# EAGLE board mso5000_socket (EAGLE 9.6.2)
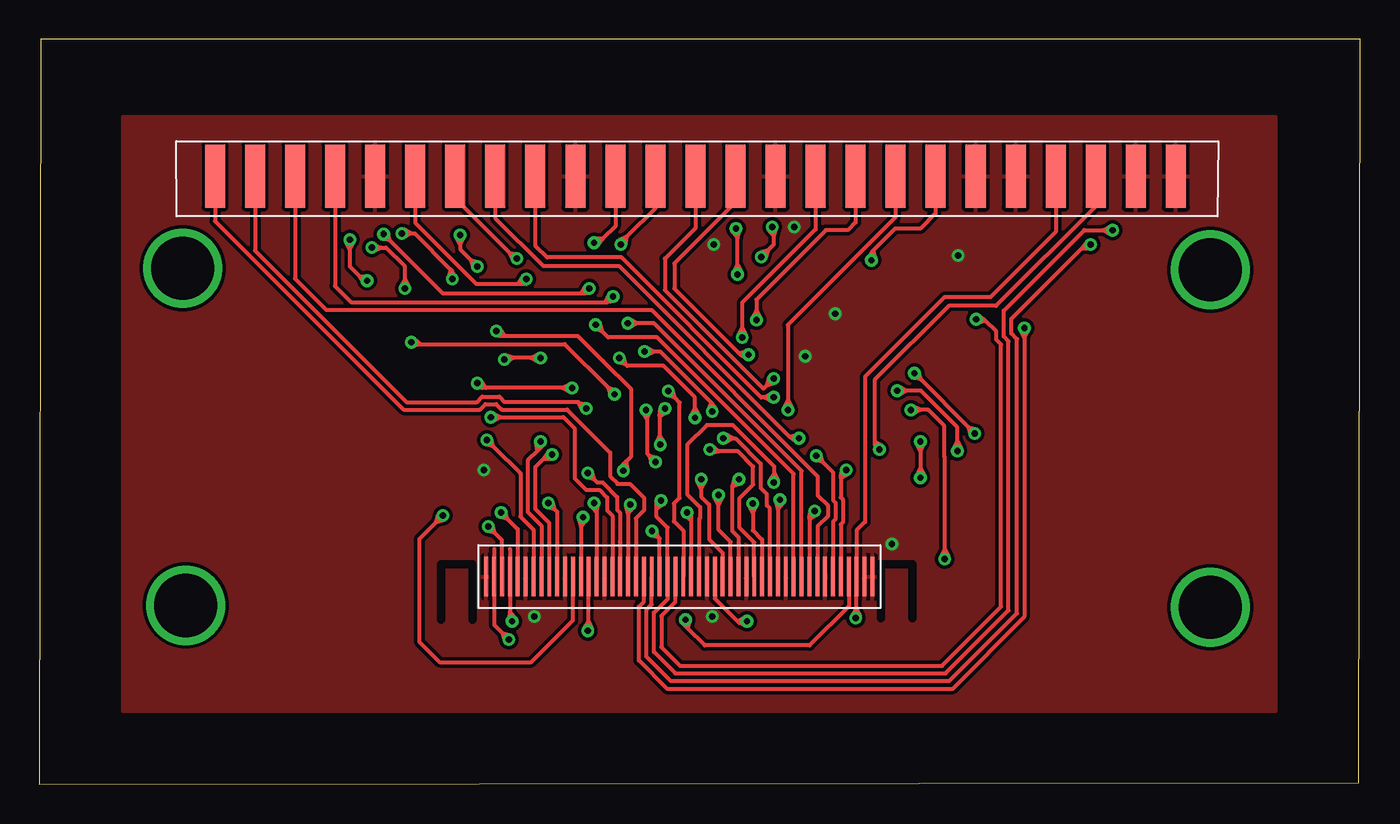
[diagram p0: board, top side]
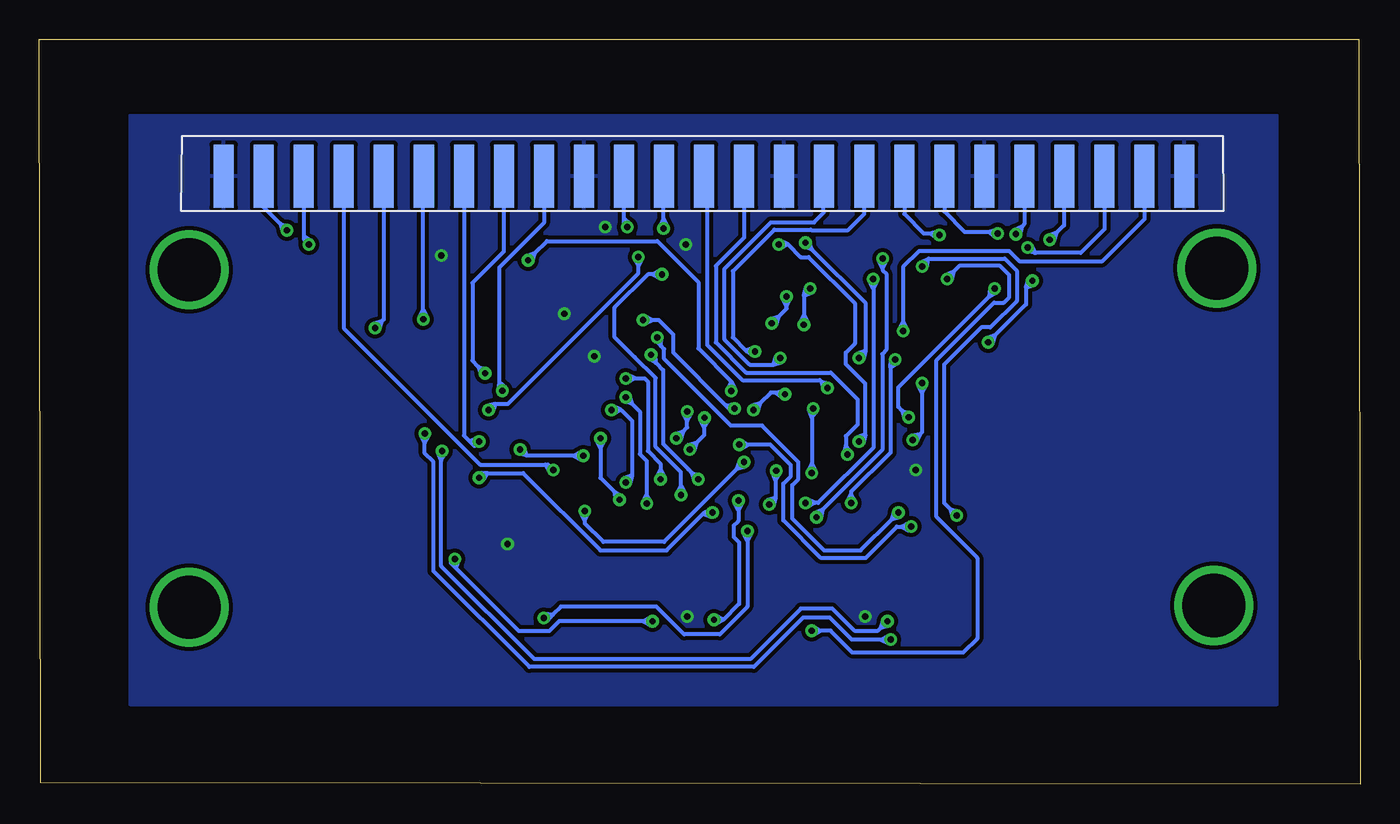
[diagram p1: board, bottom side, seen from below]

Size 83.79 x 47.23 mm. Coordinates in mm from the lower left corner, seen from the top.
Outline: 0,0 83.7,0.1 83.79,47.23 0.09,47.23 0,0
Copper layers (1*16): Top 0.035mm / dielectric 1.5mm / Bottom 0.035mm
Design rules "default *": minimum track width 6mil, minimum drill 0.35mm, track to track 0.22mm, track to pad 0.22mm, pad to pad 0.22mm, via to via 0.3mm, smd to smd 6mil, copper to edge 40mil, drill to drill 6mil, minimum pad ring 10mil, minimum via ring 8mil, stop-mask expansion 4mil, vias tented up to drill 0mil, thermal gap 10mil
tRestrict: 6 lines

## Footprints (pad centres in the part's own frame; a part is rotated, then mirrored left to right if it is on the bottom)
1X25_IDC_PADS = smd 1.27 x 4: P$1 -30.48,0; P$2 -27.94,0; P$3 -25.4,0; P$4 -22.86,0; P$5 -20.32,0; P$6 -17.78,0; P$7 -15.24,0; P$8 -12.7,0; P$9 -10.16,0; P$10 -7.62,0; P$11 -5.08,0; P$12 -2.54,0; P$13 0,0; P$14 2.54,0; P$15 5.08,0; P$16 7.62,0; P$17 10.16,0; P$18 12.7,0; P$19 15.24,0; P$20 17.78,0; P$21 20.32,0; P$22 22.86,0; P$23 25.4,0; P$24 27.94,0; P$25 30.48,0
ZIFF-050 = smd 0.25 x 2.5: P$1 -12,0; P$2 -11.5,0; P$3 -11,0; P$4 -10.5,0; P$5 -10,0; P$6 -9.5,0; P$7 -9,0; P$8 -8.5,0; P$9 -8,0; P$10 -7.5,0; P$11 -7,0; P$12 -6.5,0; P$13 -6,0; P$14 -5.5,0; P$15 -5,0; P$16 -4.5,0; P$17 -4,0; P$18 -3.5,0; P$19 -3,0; P$20 -2.5,0; P$21 -2,0; P$22 -1.5,0; P$23 -1,0; P$24 -0.5,0; P$25 0,0; P$26 0.5,0; P$27 1,0; P$28 1.5,0; P$29 2,0; P$30 2.5,0; P$31 3,0; P$32 3.5,0; P$33 4,0; P$34 4.5,0; P$35 5,0; P$36 5.5,0; P$37 6,0; P$38 6.5,0; P$39 7,0; P$40 7.5,0; P$41 8,0; P$42 8.5,0; P$43 9,0; P$44 9.5,0; P$45 10,0; P$46 10.5,0; P$47 11,0; P$48 11.5,0; P$49 12,0; P$50 12.5,0

## Placement (x,y rotation side)
IDC_BOTTOM  [1X25_IDC_PADS]  41.62,38.56 180 bottom
IDC_TOP  [1X25_IDC_PADS]  41.62,38.56 0 top
U$3  ZIFF-050  [ZIFF-050]  40.35,13.16 0 top

## Library data of the parts
IDC_BOTTOM IDC_TOP U$3 = pinhead

## Nets
!D0: IDC_BOTTOM.P$18 U$3.P$2
!D1: IDC_BOTTOM.P$17 U$3.P$4
!D2: IDC_BOTTOM.P$13 U$3.P$7
!D3: IDC_BOTTOM.P$12 U$3.P$9
!D4: IDC_BOTTOM.P$8 U$3.P$12
!D5: IDC_BOTTOM.P$7 U$3.P$14
!D6: IDC_BOTTOM.P$3 U$3.P$17
!D7: IDC_BOTTOM.P$2 U$3.P$19
!D8: IDC_BOTTOM.P$20 U$3.P$25
!D9: IDC_BOTTOM.P$19 U$3.P$27
!D10: IDC_BOTTOM.P$15 U$3.P$30
!D11: IDC_BOTTOM.P$14 U$3.P$32
!D12: IDC_BOTTOM.P$10 U$3.P$35
!D13: IDC_BOTTOM.P$9 U$3.P$37
!D14: IDC_BOTTOM.P$5 U$3.P$40
!D15: IDC_BOTTOM.P$4 U$3.P$42
+2V5: IDC_TOP.P$22 U$3.P$23 U$3.P$48
+4V_1: IDC_BOTTOM.P$21 U$3.P$21
+4V_2: IDC_BOTTOM.P$22 U$3.P$46
-2V5: IDC_BOTTOM.P$24 U$3.P$24 U$3.P$47
D0: IDC_TOP.P$17 U$3.P$3
D1: IDC_TOP.P$16 U$3.P$5
D2: IDC_TOP.P$12 U$3.P$8
D3: IDC_TOP.P$11 U$3.P$10
D4: IDC_TOP.P$7 U$3.P$13
D5: IDC_TOP.P$6 U$3.P$15
D6: IDC_TOP.P$2 U$3.P$18
D7: IDC_TOP.P$1 U$3.P$20
D8: IDC_TOP.P$19 U$3.P$26
D9: IDC_TOP.P$18 U$3.P$28
D10: IDC_TOP.P$14 U$3.P$31
D11: IDC_TOP.P$13 U$3.P$33
D12: IDC_TOP.P$9 U$3.P$36
D13: IDC_TOP.P$8 U$3.P$38
D14: IDC_TOP.P$4 U$3.P$41
D15: IDC_TOP.P$3 U$3.P$43
GND: IDC_BOTTOM.P$1 IDC_BOTTOM.P$6 IDC_BOTTOM.P$11 IDC_BOTTOM.P$16 IDC_BOTTOM.P$25 IDC_TOP.P$5 IDC_TOP.P$10 IDC_TOP.P$15 IDC_TOP.P$20 IDC_TOP.P$21 IDC_TOP.P$24 IDC_TOP.P$25 U$3.P$1 U$3.P$6 U$3.P$11 U$3.P$16 U$3.P$29 U$3.P$34 U$3.P$39 U$3.P$44 U$3.P$49 U$3.P$50
VREF_0-7: IDC_BOTTOM.P$23 U$3.P$22
VREF_8-15: IDC_TOP.P$23 U$3.P$45

## Tracks (layer width: path | path; a pad name or v marks a point on that pad's centre or on a via)
!D0  (via drill 0.4)
  Top 0.254: 28.85,14.92 U$3.P$2 28.85,10.11 29.37,9.59 | 29.37,9.59 v29.79,9.16 | v59.34,22.24 58.92,22.66 | 58.92,22.66 55.94,25.64 | 55.94,25.64 v55.52,26.06 | 29.37,9.59 29.53,9.08 v29.79,9.16 | 29.37,9.59 29.87,9.43 v29.79,9.16 | 58.92,22.66 59.08,22.15 v59.34,22.24 | 58.92,22.66 59.43,22.5 v59.34,22.24 | 55.94,25.64 55.78,26.14 v55.52,26.06 | 55.94,25.64 55.44,25.8 v55.52,26.06
  Bottom 0.254: v29.79,9.16 30.39,9.16 | 30.39,9.16 32.24,9.16 33.63,10.56 35.33,10.56 38.46,7.43 52.7,7.43 58.79,13.52 58.79,20.43 59.34,20.98 59.34,21.64 | 59.34,21.64 v59.34,22.24 | IDC_BOTTOM.P$18 54.32,33.79 56.32,31.8 56.32,26.86 55.94,26.48 | v55.52,26.06 55.94,26.48 | 30.39,9.16 29.92,9.41 v29.79,9.16 | 30.39,9.16 29.92,8.92 v29.79,9.16 | 59.34,21.64 59.59,22.11 v59.34,22.24 | 59.34,21.64 59.1,22.11 v59.34,22.24 | 55.94,26.48 55.44,26.32 v55.52,26.06 | 55.94,26.48 55.78,25.98 v55.52,26.06
!D1  (via drill 0.4)
  Top 0.254: 29.85,14.92 U$3.P$4 29.85,10.91 | v29.99,10.33 29.85,10.47 29.85,10.91 | v58.24,21.13 58.24,21.73 | 58.24,21.73 58.24,22.63 55.91,24.95 55.01,24.95 | 55.01,24.95 v54.41,24.95 | 29.85,10.91 29.72,10.4 v29.99,10.33 | 29.85,10.91 30.2,10.51 v29.99,10.33 | 58.24,21.73 57.99,21.26 v58.24,21.13 | 58.24,21.73 58.48,21.26 v58.24,21.13 | 55.01,24.95 54.54,25.2 v54.41,24.95 | 55.01,24.95 54.54,24.71 v54.41,24.95
  Bottom 0.254: 51.99,38.35 IDC_BOTTOM.P$17 51.78,35.59 54.61,32.76 54.61,25.52 | v29.99,10.33 30.41,9.91 | 30.41,9.91 30.59,9.73 32.09,9.73 33.48,11.12 35.48,11.12 38.68,7.93 52.39,7.93 58.29,13.83 58.29,20.53 | 58.29,20.53 58.29,21.13 v58.24,21.13 | 54.61,25.52 54.61,25.15 v54.41,24.95 | 30.41,9.91 30.25,10.41 v29.99,10.33 | 30.41,9.91 29.91,10.07 v29.99,10.33 | 58.29,20.53 58.49,21.03 v58.24,21.13 | 58.29,20.53 58,20.98 v58.24,21.13 | 54.61,25.52 54.23,25.16 v54.41,24.95 | 54.61,25.52 54.69,24.99 v54.41,24.95
!D2  (via drill 0.4)
  Top 0.254: v33.79,25.13 33.19,25.13 | 33.19,25.13 28.31,25.13 | 28.31,25.13 28.09,25.13 v27.79,25.43 | v28.39,21.83 28.81,21.41 | 28.81,21.41 30.51,19.71 30.51,16.97 31.35,16.13 U$3.P$7 | 33.19,25.13 33.66,24.89 v33.79,25.13 | 33.19,25.13 33.66,25.38 v33.79,25.13 | 28.31,25.13 28.02,25.58 v27.79,25.43 | 28.31,25.13 27.78,25.15 v27.79,25.43 | 28.81,21.41 28.65,21.91 v28.39,21.83 | 28.81,21.41 28.31,21.57 v28.39,21.83
  Bottom 0.254: IDC_BOTTOM.P$13 41.42,38.36 41.42,27.86 39.19,25.63 34.29,25.63 34.21,25.55 | v27.79,25.43 27.79,24.83 | 27.79,24.83 27.79,22.33 27.92,22.2 | v28.39,21.83 28.29,21.83 27.92,22.2 | v33.79,25.13 34.21,25.55 | 34.21,25.55 33.71,25.39 v33.79,25.13 | 34.21,25.55 34.05,25.05 v33.79,25.13 | 27.79,24.83 28.04,25.3 v27.79,25.43 | 27.79,24.83 27.54,25.3 v27.79,25.43 | 27.92,22.2 28.14,21.72 v28.39,21.83 | 27.92,22.2 28.44,22.1 v28.39,21.83
!D3  (via drill 0.4)
  Top 0.254: v32.52,20.9 32.26,20.9 31.99,20.63 | U$3.P$9 32.35,16.57 31.46,17.46 31.46,20.1 31.99,20.63 | 31.99,20.63 32.52,20.62 v32.52,20.9 | 31.99,20.63 32.3,21.06 v32.52,20.9
  Bottom 0.254: IDC_BOTTOM.P$12 39.08,34.66 40.88,32.86 40.88,28.02 38.96,26.1 33.59,26.1 31.89,24.4 31.89,22.8 32.62,22.07 32.62,21.49 | 32.62,21.49 32.62,21.45 | 32.62,21.45 32.62,21.39 32.52,21.29 v32.52,20.9 | 32.62,21.45 32.32,21.05 v32.52,20.9 | 32.62,21.49 32.79,20.98 v32.52,20.9
!D4  (via drill 0.4)
  Top 0.254: v26.69,34.83 26.69,34.23 | 26.69,34.23 26.69,33.93 27.37,33.25 | 27.37,33.25 v27.79,32.83 | v25.59,17.03 25.17,16.61 | 25.17,16.61 24.09,15.53 24.09,9.03 25.38,7.73 31.2,7.73 33.85,10.39 U$3.P$12 | 26.69,34.23 26.93,34.7 v26.69,34.83 | 26.69,34.23 26.45,34.7 v26.69,34.83 | 27.37,33.25 27.53,32.75 v27.79,32.83 | 27.37,33.25 27.87,33.09 v27.79,32.83 | 25.17,16.61 25.67,16.77 v25.59,17.03 | 25.17,16.61 25.33,17.11 v25.59,17.03
  Bottom 0.254: IDC_BOTTOM.P$8 28.92,36.16 27.69,34.93 27.28,34.93 | 27.28,34.93 26.69,34.93 v26.69,34.83 | v27.79,32.83 27.79,32.93 27.42,33.3 | 27.42,33.3 27.39,33.33 22.55,33.33 21.79,32.57 21.79,30.63 23.46,28.96 24.03,28.96 26.39,26.6 26.39,17.83 26.01,17.45 | 26.01,17.45 v25.59,17.03 | 27.28,34.93 26.77,35.09 v26.69,34.83 | 27.28,34.93 26.86,34.61 v26.69,34.83 | 27.42,33.3 27.52,32.78 v27.79,32.83 | 27.42,33.3 27.9,33.08 v27.79,32.83 | 26.01,17.45 25.51,17.29 v25.59,17.03 | 26.01,17.45 25.85,16.95 v25.59,17.03
!D5  (via drill 0.4)
  Top 0.254: v26.19,32.03 26.19,32.53 26.1,32.62 | 26.1,32.62 23.79,34.93 23.59,34.93 | v22.99,34.93 23.59,34.93 | v34.79,9.73 34.85,9.79 34.85,10.33 | 34.85,10.33 U$3.P$14 | 23.59,34.93 23.12,35.17 v22.99,34.93 | 23.59,34.93 23.12,34.68 v22.99,34.93 | 26.1,32.62 25.93,32.12 v26.19,32.03 | 26.1,32.62 26.41,32.19 v26.19,32.03 | 34.85,10.33 34.56,9.88 v34.79,9.73 | 34.85,10.33 35.05,9.83 v34.79,9.73
  Bottom 0.254: IDC_BOTTOM.P$7 26.38,36.32 25.09,35.03 23.58,35.03 | 23.58,35.03 22.99,35.03 v22.99,34.93 | 34.19,9.73 33.59,9.73 32.2,8.34 25.18,8.34 24.29,9.23 24.29,14.36 26.88,16.94 26.88,26.88 23.23,30.53 22.61,30.53 22.26,30.89 22.26,32.27 22.85,32.86 25.43,32.86 25.8,32.49 | 34.19,9.73 v34.79,9.73 | v26.19,32.03 26.19,32.1 25.8,32.49 | 23.58,35.03 23.07,35.19 v22.99,34.93 | 23.58,35.03 23.16,34.71 v22.99,34.93 | 25.8,32.49 25.92,31.97 v26.19,32.03 | 25.8,32.49 26.3,32.28 v26.19,32.03 | 34.19,9.73 34.66,9.48 v34.79,9.73 | 34.19,9.73 34.66,9.97 v34.79,9.73
!D6  (via drill 0.4)
  Top 0.254: v23.19,31.43 23.19,32.03 | 23.19,32.03 23.19,32.83 21.99,34.03 21.69,34.03 | v21.09,34.03 21.64,34.03 | 21.64,34.03 21.69,34.03 | v28.64,23.27 29.24,23.27 | 29.24,23.27 33.25,23.27 33.96,22.56 33.96,19.39 34.69,18.66 35.53,18.66 36.02,18.17 36.02,17.36 36.35,17.03 U$3.P$17 | 21.64,34.03 21.21,34.25 v21.09,34.03 | 21.69,34.03 21.22,33.78 v21.09,34.03 | 23.19,32.03 22.95,31.56 v23.19,31.43 | 23.19,32.03 23.43,31.56 v23.19,31.43 | 29.22,23.26 28.76,23.5 v28.64,23.27 | 29.24,23.27 29.22,23.26 | 29.22,23.26 28.77,23.03 v28.64,23.27
  Bottom 0.254: IDC_BOTTOM.P$3 16.22,35.2 17.72,33.7 20.59,33.7 | 23.52,30.93 29.29,25.16 29.29,23.92 29.06,23.69 | 23.52,30.93 23.19,31.26 v23.19,31.43 | v28.64,23.27 29.06,23.69 | 20.59,33.7 20.63,33.7 20.96,34.03 v21.09,34.03 | 20.59,33.7 21.12,33.75 v21.09,34.03 | 20.59,33.7 20.85,34.16 v21.09,34.03 | 23.52,30.93 23.46,31.46 v23.19,31.43 | 23.52,30.93 23.05,31.19 v23.19,31.43 | 29.06,23.69 28.56,23.53 v28.64,23.27 | 29.06,23.69 28.9,23.19 v28.64,23.27
!D7  (via drill 0.4)
  Top 0.254: v28.99,28.73 28.99,28.63 29.19,28.43 29.51,28.43 | 29.51,28.43 34.15,28.43 35.75,26.83 35.77,26.83 37.52,25.07 37.52,20.76 37.21,20.45 | v37.49,17.73 37.35,17.59 37.35,17.15 | 37.35,17.15 U$3.P$19 | 37.21,20.45 37.04,20.28 v37.04,19.88 | 29.51,28.43 29.22,28.88 v28.99,28.73 | 29.51,28.43 28.98,28.45 v28.99,28.73 | 37.21,20.45 36.84,20.07 v37.04,19.88 | 37.21,20.45 37.31,19.93 v37.04,19.88 | 37.35,17.15 37.7,17.55 v37.49,17.73 | 37.35,17.15 37.22,17.66 v37.49,17.73
  Bottom 0.254: IDC_BOTTOM.P$2 13.68,35.84 16.39,33.13 21.57,33.13 22.25,33.81 27.99,33.81 28.99,32.8 28.99,29.33 | 28.99,29.33 v28.99,28.73 | v37.04,19.88 37.09,19.83 37.09,19.28 | 37.09,19.28 37.09,18.18 | 37.09,18.18 37.09,18.13 v37.49,17.73 | 28.99,29.33 28.74,28.86 v28.99,28.73 | 28.99,29.33 29.23,28.86 v28.99,28.73 | 37.09,19.28 37.3,19.77 v37.04,19.88 | 37.09,19.28 36.81,19.73 v37.04,19.88 | 37.09,18.18 37.22,17.66 v37.49,17.73 | 37.09,18.18 37.59,17.99 v37.49,17.73
!D8  (via drill 0.4)
  Top 0.254: v59.44,29.48 59.94,29.48 60.03,29.39 | U$3.P$25 40.35,11.57 39.46,10.67 39.46,8.69 40.65,7.5 57.26,7.5 61.02,11.26 61.02,27.89 60.71,28.19 60.71,28.71 60.03,29.39 | 60.03,29.39 59.6,29.7 v59.44,29.48 | 60.03,29.39 59.53,29.22 v59.44,29.48
  Bottom 0.254: v59.44,29.48 59.44,30.08 | 59.44,30.08 59.44,38.52 IDC_BOTTOM.P$20 | 59.44,30.08 59.2,29.61 v59.44,29.48 | 59.44,30.08 59.69,29.61 v59.44,29.48
!D9  (via drill 0.4)
  Top 0.254: v55.89,21.73 55.89,21.13 | 55.89,21.13 55.89,20.03 | 55.89,20.03 55.89,19.63 55.99,19.53 v55.89,19.43 | v41.09,17.23 41.35,16.97 | v41.09,17.23 41.35,16.97 41.35,16.69 | 41.35,16.69 U$3.P$27 | 55.89,21.13 56.13,21.6 v55.89,21.73 | 55.89,21.13 55.64,21.6 v55.89,21.73 | 55.89,20.03 55.64,19.56 v55.89,19.43 | 55.89,20.03 56.13,19.56 v55.89,19.43 | 41.35,16.69 41.37,17.22 v41.09,17.23 | 41.35,16.69 40.92,17.01 v41.09,17.23
  Bottom 0.254: 56.89,38.53 IDC_BOTTOM.P$19 56.86,22.1 56.49,21.73 | 56.49,21.73 56.19,21.43 v55.89,21.73 | v55.89,19.43 55.59,19.73 55.37,19.73 | 55.37,19.73 53.09,19.73 48.19,14.83 43.99,14.83 41.68,17.14 | 41.68,17.14 41.59,17.23 v41.09,17.23 | 56.49,21.73 56.02,21.98 v55.89,21.73 | 56.49,21.73 56.02,21.48 v55.89,21.73 | 55.37,19.73 55.66,19.28 v55.89,19.43 | 55.37,19.73 55.9,19.71 v55.89,19.43 | 41.68,17.14 41.25,17.45 v41.09,17.23 | 41.68,17.14 41.18,16.97 v41.09,17.23
!D10  (via drill 0.4)
  Top 0.254: U$3.P$30 42.85,11.77 44.29,10.33 | 44.29,10.33 44.39,10.23 44.79,10.23 v44.89,10.33 | v57.44,14.28 57.44,14.88 | 57.44,14.88 57.44,20.75 57.41,20.79 57.41,22.71 56.39,23.73 55.89,23.73 | 55.89,23.73 v55.29,23.73 | v45.79,33.43 46.21,33.85 | 46.21,33.85 46.59,34.23 46.59,34.74 | 46.59,34.74 46.59,35.33 v46.49,35.33 | 44.29,10.33 44.76,10.09 v44.89,10.33 | 44.29,10.33 44.76,10.58 v44.89,10.33 | 57.44,14.88 57.2,14.41 v57.44,14.28 | 57.44,14.88 57.69,14.41 v57.44,14.28 | 55.89,23.73 55.42,23.98 v55.29,23.73 | 55.89,23.73 55.42,23.48 v55.29,23.73 | 46.21,33.85 45.71,33.69 v45.79,33.43 | 46.21,33.85 46.05,33.35 v45.79,33.43 | 46.59,34.74 46.75,35.24 v46.49,35.33 | 46.59,34.74 46.27,35.16 v46.49,35.33
  Bottom 0.254: v44.89,10.33 45.49,10.33 | 45.49,10.33 50.82,10.33 51.45,9.7 53.36,9.7 57.35,13.69 | 57.35,13.69 57.69,14.03 v57.44,14.28 | v55.29,23.73 54.9,24.12 54.84,24.12 | 54.84,24.12 54.07,24.12 45.79,32.4 45.79,32.83 | 45.79,32.83 v45.79,33.43 | v46.49,35.33 46.7,35.54 46.7,35.89 | 46.7,35.89 IDC_BOTTOM.P$15 | 45.49,10.33 45.02,10.58 v44.89,10.33 | 45.49,10.33 45.02,10.09 v44.89,10.33 | 57.35,13.69 57.66,14.12 v57.44,14.28 | 57.35,13.69 57.18,14.19 v57.44,14.28 | 54.84,24.12 55.03,23.63 v55.29,23.73 | 54.84,24.12 55.35,24 v55.29,23.73 | 45.79,32.83 46.03,33.3 v45.79,33.43 | 45.79,32.83 45.55,33.3 v45.79,33.43 | 46.7,35.89 46.3,35.53 v46.49,35.33 | 46.7,35.89 46.76,35.36 v46.49,35.33
!D11  (via drill 0.4)
  Top 0.254: U$3.P$32 43.85,15.37 43.09,16.13 43.09,17.73 | v44.29,32.33 44.29,32.93 | 44.29,32.93 44.29,34.64 | 44.29,34.64 44.29,35.13 v44.19,35.23 | 43.09,17.73 v43.09,18.33 | 43.09,17.73 43.34,18.2 v43.09,18.33 | 43.09,17.73 42.84,18.2 v43.09,18.33 | 44.29,32.93 44.05,32.46 v44.29,32.33 | 44.29,32.93 44.53,32.46 v44.29,32.33 | 44.29,34.64 44.45,35.14 v44.19,35.23 | 44.29,34.64 43.97,35.06 v44.19,35.23
  Bottom 0.254: 44.16,37.06 IDC_BOTTOM.P$14 44.19,38.53 44.19,35.83 | v44.19,35.23 44.19,35.83 | v43.09,18.33 43.09,18.93 | 43.09,18.93 43.09,19.79 44.69,21.39 44.69,25.76 46.02,27.09 46.02,27.06 47.29,28.33 47.29,30.23 45.19,32.33 44.89,32.33 | v44.29,32.33 44.89,32.33 | 43.09,18.93 42.84,18.46 v43.09,18.33 | 43.09,18.93 43.34,18.46 v43.09,18.33 | 44.89,32.33 44.42,32.57 v44.29,32.33 | 44.89,32.33 44.42,32.09 v44.29,32.33 | 44.19,35.83 43.95,35.36 v44.19,35.23 | 44.19,35.83 44.44,35.36 v44.19,35.23
!D12  (via drill 0.4)
  Top 0.254: U$3.P$35 45.35,15.33 44.43,16.25 44.43,18.14 45.29,19 45.29,20.13 44.32,21.1 43.11,21.1 | v42.52,21.23 42.59,21.29 42.85,21.29 43.05,21.1 43.08,21.1 | 43.11,21.1 43.08,21.1 | v41.59,23.23 41.59,23.83 | 41.59,23.83 41.59,24.53 39.59,26.53 37.29,26.53 37.21,26.61 | 37.21,26.61 v36.79,27.03 | 43.08,21.1 42.69,21.43 v42.52,21.23 | 43.11,21.1 42.6,20.96 v42.52,21.23 | 41.59,23.83 41.34,23.36 v41.59,23.23 | 41.59,23.83 41.84,23.36 v41.59,23.23 | 37.21,26.61 37.05,27.11 v36.79,27.03 | 37.21,26.61 36.71,26.77 v36.79,27.03
  Bottom 0.254: 34,38.58 34.04,38.62 34.04,36.24 34.65,35.63 | IDC_BOTTOM.P$10 34,38.58 | v42.52,21.23 42.1,21.65 | 42.1,21.65 41.62,22.13 41.62,22.63 | v41.59,23.23 41.62,23.2 41.62,22.63 | v36.79,27.03 37.21,26.61 | 37.21,26.61 37.22,26.6 38.73,26.6 40.32,28.19 40.32,32.7 37.39,35.63 34.65,35.63 | 34.65,35.63 | IDC_BOTTOM.P$10 34,38.58 | 42.1,21.65 42.26,21.15 v42.52,21.23 | 42.1,21.65 42.61,21.49 v42.52,21.23 | 41.62,22.63 41.84,23.12 v41.59,23.23 | 41.62,22.63 41.35,23.09 v41.59,23.23 | 37.21,26.61 37.05,27.11 v36.79,27.03 | 37.21,26.61 36.71,26.77 v36.79,27.03
!D13  (via drill 0.4)
  Top 0.254: U$3.P$37 46.35,17.5 46.16,17.69 46.16,18.39 45.76,18.79 45.76,20.33 44.16,21.93 43.99,21.93 | v42.69,23.63 42.69,24.13 42.6,24.22 | 42.6,24.22 39.39,27.43 38.99,27.43 | 38.99,27.43 v38.39,27.43 | v43.39,21.93 43.99,21.93 | 43.99,21.93 43.52,22.18 v43.39,21.93 | 43.99,21.93 43.52,21.68 v43.39,21.93 | 42.6,24.22 42.43,23.72 v42.69,23.63 | 42.6,24.22 42.91,23.79 v42.69,23.63 | 38.99,27.43 38.52,27.68 v38.39,27.43 | 38.99,27.43 38.52,27.18 v38.39,27.43
  Bottom 0.254: v43.39,21.93 42.97,22.35 | 42.97,22.35 42.69,22.63 42.69,23.03 | 42.69,23.03 v42.69,23.63 | 38.98,27.52 39.79,28.33 39.79,32.53 37.16,35.16 34.85,35.16 34.82,35.13 32.49,35.13 31.46,36.16 IDC_BOTTOM.P$9 | 38.98,27.52 38.89,27.43 v38.39,27.43 | 42.97,22.35 43.13,21.85 v43.39,21.93 | 42.97,22.35 43.47,22.19 v43.39,21.93 | 42.69,23.03 42.94,23.5 v42.69,23.63 | 42.69,23.03 42.45,23.5 v42.69,23.63 | 38.98,27.52 38.48,27.69 v38.39,27.43 | 38.98,27.52 38.55,27.21 v38.39,27.43
!D14  (via drill 0.4)
  Top 0.254: v34.89,31.43 34.59,31.13 34.37,31.13 | v21.84,34.88 22.26,34.46 | 22.26,34.46 25.59,31.13 34.37,31.13 | U$3.P$40 47.85,19.67 39.19,28.33 36.09,28.33 35.71,28.71 | 35.71,28.71 v35.29,29.13 | 22.26,34.46 22.1,34.96 v21.84,34.88 | 22.26,34.46 21.76,34.62 v21.84,34.88 | 34.37,31.13 34.9,31.15 v34.89,31.43 | 34.37,31.13 34.66,31.58 v34.89,31.43 | 35.71,28.71 35.55,29.21 v35.29,29.13 | 35.71,28.71 35.21,28.87 v35.29,29.13
  Bottom 0.254: IDC_BOTTOM.P$5 21.3,35.52 21.47,35.35 | v21.84,34.88 21.84,34.98 21.47,35.35 | v34.89,31.43 35.29,31.03 35.29,30.98 | 35.29,30.98 35.29,29.73 | 35.29,29.73 v35.29,29.13 | 21.47,35.35 21.57,34.83 v21.84,34.88 | 21.47,35.35 21.95,35.13 v21.84,34.88 | 35.29,30.98 35.16,31.5 v34.89,31.43 | 35.29,30.98 34.79,31.17 v34.89,31.43 | 35.29,29.73 35.05,29.26 v35.29,29.13 | 35.29,29.73 35.54,29.26 v35.29,29.13
!D15  (via drill 0.4)
  Top 0.254: v19.69,34.53 19.69,33.93 | 19.69,33.93 19.69,32.83 20.28,32.24 | v20.79,31.93 20.59,31.93 20.28,32.24 | 24.18,27.9 23.72,27.9 v23.59,28.03 | 24.18,27.9 33.32,27.9 36.07,25.15 | v38.48,23.73 38.56,23.65 38.56,23.14 | 38.56,23.14 38.56,20.95 38.67,20.85 | v39.09,20.42 38.67,20.85 | v49.19,17.33 48.85,16.99 48.85,16.84 | 48.85,16.84 U$3.P$42 | 36.07,25.15 v36.49,24.73 | 19.69,33.93 19.93,34.4 v19.69,34.53 | 19.69,33.93 19.45,34.4 v19.69,34.53 | 20.28,32.24 20.55,31.79 v20.79,31.93 | 20.28,32.24 20.81,32.21 v20.79,31.93 | 24.18,27.9 23.77,28.24 v23.59,28.03 | 24.18,27.9 23.66,27.76 v23.59,28.03 | 36.07,25.15 36.23,24.65 v36.49,24.73 | 36.07,25.15 36.57,24.99 v36.49,24.73 | 38.56,23.14 38.74,23.64 v38.48,23.73 | 38.56,23.14 38.26,23.57 v38.48,23.73 | 38.67,20.85 38.83,20.34 v39.09,20.42 | 38.67,20.85 39.17,20.69 v39.09,20.42 | 48.85,16.84 49.32,17.09 v49.19,17.33 | 48.85,16.84 48.92,17.36 v49.19,17.33
  Bottom 0.254: IDC_BOTTOM.P$4 18.79,38.53 18.79,35.43 19.27,34.95 | 19.27,34.95 v19.69,34.53 | v23.59,28.03 23.17,28.45 | 23.17,28.45 21.19,30.43 21.19,31.48 | v20.79,31.93 21.19,31.53 21.19,31.48 | v36.49,24.73 36.49,24.83 37.08,24.83 | 38.06,24.16 37.39,24.83 37.08,24.83 | 38.06,24.16 v38.48,23.74 v38.48,23.73 | 39.52,20 44.15,15.37 48,15.37 49.19,16.56 49.19,16.73 | 39.52,20 v39.1,20.42 v39.09,20.42 | v49.19,17.33 49.19,16.73 | 19.27,34.95 19.43,34.45 v19.69,34.53 | 19.27,34.95 19.77,34.79 v19.69,34.53 | 21.19,31.48 21.06,32 v20.79,31.93 | 21.19,31.48 20.69,31.67 v20.79,31.93 | 23.17,28.45 23.33,27.95 v23.59,28.03 | 23.17,28.45 23.67,28.29 v23.59,28.03 | 37.08,24.83 36.58,24.99 v36.49,24.73 | 37.08,24.83 36.66,24.51 v36.49,24.73 | 38.06,24.16 38.22,23.65 v38.48,23.73 | 38.06,24.16 38.57,23.99 v38.48,23.73 | 39.52,20 39.35,20.51 v39.09,20.42 | 39.52,20 39.01,20.16 v39.09,20.42 | 49.19,16.73 49.44,17.2 v49.19,17.33 | 49.19,16.73 48.95,17.2 v49.19,17.33
+2V5  (via drill 0.4)
  Top 0.254: IDC_TOP.P$22 64.48,35.02 60.34,30.88 57.42,30.88 52.39,25.85 52.39,16.63 51.85,16.09 U$3.P$48 51.85,11.13 | U$3.P$23 39.35,15.57 39.3,15.62 | 39.3,15.62 v38.87,16.05 | v51.79,10.53 51.85,10.59 51.85,11.13 | 39.3,15.62 39.13,16.13 v38.87,16.05 | 39.3,15.62 38.79,15.79 v38.87,16.05 | 51.85,11.13 51.56,10.68 v51.79,10.53 | 51.85,11.13 52.05,10.63 v51.79,10.53
  Bottom 0.254: v38.87,16.05 38.87,15.45 | 38.87,15.45 38.87,11.25 40.62,9.5 42.89,9.5 44.65,11.26 50.7,11.26 51.23,10.73 | 51.23,10.73 51.43,10.53 v51.79,10.53 | 38.87,15.45 39.12,15.92 v38.87,16.05 | 38.87,15.45 38.62,15.92 v38.87,16.05 | 51.23,10.73 51.59,10.34 v51.79,10.53 | 51.23,10.73 51.75,10.8 v51.79,10.53
+4V_1  (via drill 0.4)
  Top 0.254: v62.49,28.93 62.49,28.35 | 62.49,28.35 62.49,28.33 | 62.49,28.33 62.49,10.6 57.92,6.03 39.86,6.03 38.04,7.85 38.04,11.26 38.35,11.58 U$3.P$21 | 62.49,28.33 62.73,28.8 v62.49,28.93 | 62.49,28.35 62.25,28.81 v62.49,28.93
  Bottom 0.254: IDC_BOTTOM.P$21 61.94,29.48 62.07,29.35 | 62.07,29.35 v62.49,28.93 | 62.07,29.35 62.23,28.85 v62.49,28.93 | 62.07,29.35 62.57,29.19 v62.49,28.93
+4V_2  (via drill 0.4)
  Top 0.254: v51.19,19.93 50.85,19.59 50.85,19.44 | 50.85,19.44 50.85,18.18 50.97,18.07 50.97,16.59 50.85,16.47 U$3.P$46 | 50.85,19.44 51.32,19.69 v51.19,19.93 | 50.85,19.44 50.92,19.96 v51.19,19.93
  Bottom 0.254: IDC_BOTTOM.P$22 64.48,28.92 55.82,20.26 51.69,20.26 | 51.69,20.26 51.52,20.26 v51.19,19.93 | 51.69,20.26 51.16,20.21 v51.19,19.93 | 51.69,20.26 51.43,19.8 v51.19,19.93
-2V5  (via drill 0.4)
  Top 0.254: 67.49,35.13 66.29,35.13 61.19,30.03 61.19,28.39 61.49,28.09 61.49,11.02 57.49,7.03 40.35,7.03 38.99,8.39 38.99,10.87 39.85,11.73 U$3.P$24 39.85,16.26 39.16,16.95 39.16,17.45 | 67.49,35.13 v68.09,35.13 | U$3.P$47 51.35,11.29 48.86,8.8 42.22,8.8 41.16,9.86 | v40.99,10.43 40.99,10.03 41.16,9.86 | v39.44,17.98 39.16,17.98 39.16,17.45 | 67.49,35.13 67.96,34.88 v68.09,35.13 | 67.49,35.13 67.96,35.38 v68.09,35.13 | 41.16,9.86 41.26,10.38 v40.99,10.43 | 41.16,9.86 40.79,10.24 v40.99,10.43 | 39.16,17.45 39.6,17.75 v39.44,17.98 | 39.16,17.45 39.16,17.98 v39.44,17.98
  Bottom 0.254: v68.09,35.13 68.51,35.55 | 68.51,35.55 69.56,36.6 IDC_BOTTOM.P$24 | v39.44,17.98 39.44,17.38 | 39.44,17.38 39.44,16.68 39.74,16.38 39.74,15.68 39.39,15.33 39.39,11.43 40.39,10.43 | v40.99,10.43 40.39,10.43 | 68.51,35.55 68.01,35.39 v68.09,35.13 | 68.51,35.55 68.35,35.05 v68.09,35.13 | 40.39,10.43 40.86,10.19 v40.99,10.43 | 40.39,10.43 40.86,10.68 v40.99,10.43 | 39.44,17.38 39.69,17.85 v39.44,17.98 | 39.44,17.38 39.2,17.85 v39.44,17.98
D0  (via drill 0.4)
  Top 0.254: 51.78,36.62 IDC_TOP.P$17 51.78,35.62 51.29,35.13 49.89,35.13 45.49,30.73 45.49,30.03 | 45.49,30.03 v45.49,29.43 | v28.49,16.33 29.35,15.47 U$3.P$3 | v39.69,23.83 39.35,23.49 39.35,23.34 | 39.35,23.34 39.35,22.13 | 39.35,22.13 39.35,21.57 v39.39,21.53 | 45.49,30.03 45.24,29.56 v45.49,29.43 | 45.49,30.03 45.73,29.56 v45.49,29.43 | 39.35,22.13 39.14,21.64 v39.39,21.53 | 39.35,22.13 39.62,21.67 v39.39,21.53 | v28.49,16.33 28.75,16.41 28.91,15.91 28.41,16.07 v28.49,16.33 | 39.35,23.34 39.82,23.59 v39.69,23.83 | 39.35,23.34 39.42,23.87 v39.69,23.83
  Bottom 0.254: 29.09,16.33 29.39,16.33 31.39,14.33 34.19,14.33 36.59,16.73 36.59,19.06 36.11,19.54 36.11,20.22 37.42,21.53 38.79,21.53 | 29.09,16.33 v28.49,16.33 | 44.89,29.43 44.49,29.43 43.59,28.53 43.59,27.37 40.25,24.04 | 44.89,29.43 v45.49,29.43 | 38.79,21.53 v39.39,21.53 | 40.25,24.04 40.05,23.83 v39.69,23.83 | 44.89,29.43 45.36,29.18 v45.49,29.43 | 44.89,29.43 45.36,29.68 v45.49,29.43 | 38.79,21.53 39.26,21.29 v39.39,21.53 | 38.79,21.53 39.26,21.78 v39.39,21.53 | 29.09,16.33 28.62,16.57 v28.49,16.33 | 29.09,16.33 28.62,16.09 v28.49,16.33 | 40.25,24.04 39.73,24.1 v39.69,23.83 | 40.25,24.04 39.89,23.64 v39.69,23.83
D1  (via drill 0.4)
  Top 0.254: 48.79,38.11 IDC_TOP.P$16 49.24,35.18 44.59,30.53 44.59,28.93 | 44.59,28.93 v44.59,28.33 | v29.29,17.23 29.71,16.81 | 29.71,16.81 30.35,16.17 U$3.P$5 | 44.59,28.93 44.34,28.46 v44.59,28.33 | 44.59,28.93 44.84,28.46 v44.59,28.33 | 29.71,16.81 29.55,17.31 v29.29,17.23 | 29.71,16.81 29.21,16.97 v29.29,17.23
  Bottom 0.254: 29.71,16.81 31.69,14.83 34.01,14.83 36.02,16.84 36.02,18.96 35.64,19.34 35.64,20.42 37.95,22.73 39.92,22.73 44.16,26.97 44.16,27.59 44.36,27.8 | 29.71,16.81 v29.29,17.23 | 44.36,27.8 44.59,28.02 v44.59,28.33 | 44.36,27.8 44.76,28.13 v44.59,28.33 | 44.36,27.8 44.32,28.31 v44.59,28.33 | 29.71,16.81 29.55,17.31 v29.29,17.23 | 29.71,16.81 29.21,16.97 v29.29,17.23
D2  (via drill 0.4)
  Top 0.254: IDC_TOP.P$12 39.08,36.52 37.26,34.7 | 37.26,34.7 36.89,34.33 v36.89,34.23 | v31.79,21.73 31.79,21.34 | 31.79,21.34 31.61,21.16 | 31.61,21.16 30.99,20.54 30.99,17.26 31.85,16.4 31.85,13.43 U$3.P$8 | 37.26,34.7 36.78,34.48 v36.89,34.23 | 37.26,34.7 37.16,34.18 v36.89,34.23 | 31.79,21.34 31.98,21.54 v31.79,21.73 | 31.61,21.16 31.52,21.68 v31.79,21.73
  Bottom 0.254: v36.89,34.23 36.29,34.23 | 36.29,34.23 35.49,33.43 34.99,33.43 32.06,30.5 32.06,27.93 32.62,27.37 32.62,26.63 31.39,25.4 31.39,22.18 | 31.39,22.18 31.39,22.13 v31.79,21.73 | 36.29,34.23 36.76,33.98 v36.89,34.23 | 36.29,34.23 36.76,34.47 v36.89,34.23 | 31.39,22.18 31.52,21.66 v31.79,21.73 | 31.39,22.18 31.89,21.99 v31.79,21.73
D3  (via drill 0.4)
  Top 0.254: IDC_TOP.P$11 36.54,35.38 35.74,34.58 | 35.74,34.58 35.39,34.23 35.29,34.23 v35.19,34.33 | v31.79,27.03 31.19,27.03 | 31.19,27.03 30.08,27.03 | 30.08,27.03 29.59,27.03 v29.49,26.93 | U$3.P$10 32.85,17.27 32.71,17.41 | v32.29,17.83 32.71,17.41 | 35.74,34.58 35.2,34.61 v35.19,34.33 | 35.74,34.58 35.41,34.16 v35.19,34.33 | 31.19,27.03 31.66,26.79 v31.79,27.03 | 31.19,27.03 31.66,27.28 v31.79,27.03 | 30.08,27.03 29.57,27.19 v29.49,26.93 | 30.08,27.03 29.66,26.71 v29.49,26.93 | 32.71,17.41 32.55,17.91 v32.29,17.83 | 32.71,17.41 32.21,17.57 v32.29,17.83
  Bottom 0.254: v35.19,34.33 34.77,33.91 | 34.77,33.91 31.39,30.53 31.39,27.48 | v31.79,27.03 31.39,27.43 31.39,27.48 | v29.49,26.93 29.79,26.63 29.79,26.41 | 29.79,26.41 29.79,21.03 32.29,18.53 32.29,18.43 | 32.29,18.43 v32.29,17.83 | 34.77,33.91 35.27,34.07 v35.19,34.33 | 34.77,33.91 34.93,34.41 v35.19,34.33 | 31.39,27.48 31.52,26.96 v31.79,27.03 | 31.39,27.48 31.89,27.29 v31.79,27.03 | 29.79,26.41 29.77,26.94 v29.49,26.93 | 29.79,26.41 29.34,26.7 v29.49,26.93 | 32.29,18.43 32.05,17.96 v32.29,17.83 | 32.29,18.43 32.54,17.96 v32.29,17.83
D4  (via drill 0.4)
  Top 0.254: IDC_TOP.P$7 26.49,38.45 26.49,37.03 29.82,33.7 | v30.29,33.33 30.19,33.33 29.82,33.7 | v34.49,16.93 34.35,16.79 34.35,16.35 | 34.35,16.35 U$3.P$13 | 29.82,33.7 30.04,33.22 v30.29,33.33 | 29.82,33.7 30.34,33.6 v30.29,33.33 | 34.35,16.35 34.7,16.75 v34.49,16.93 | 34.35,16.35 34.22,16.86 v34.49,16.93
  Bottom 0.254: v30.29,33.33 30.39,33.23 | v34.49,16.93 34.49,17.03 34.12,17.4 | v30.29,33.33 30.29,32.73 | 30.29,32.73 30.29,32.6 30.06,32.37 30.06,27.53 30.32,27.27 30.32,21.2 34.12,17.4 | 30.29,32.73 30.54,33.2 v30.29,33.33 | 30.29,32.73 30.04,33.2 v30.29,33.33 | 34.12,17.4 34.22,16.88 v34.49,16.93 | 34.12,17.4 34.6,17.18 v34.49,16.93
D5  (via drill 0.4)
  Top 0.254: v30.89,32.03 30.89,31.73 30.37,31.73 | v35.19,17.83 35.35,17.67 35.35,17.25 | 35.35,17.25 U$3.P$15 | IDC_TOP.P$6 23.84,35.61 27.72,31.73 30.37,31.73 | 30.37,31.73 30.9,31.75 v30.89,32.03 | 30.37,31.73 30.66,32.18 v30.89,32.03 | 35.35,17.25 35.46,17.77 v35.19,17.83 | 35.35,17.25 34.99,17.64 v35.19,17.83
  Bottom 0.254: v30.89,32.03 30.89,31.43 | 30.89,31.43 30.89,21.33 34.39,17.83 34.59,17.83 | 34.59,17.83 v35.19,17.83 | 30.89,31.43 31.13,31.9 v30.89,32.03 | 30.89,31.43 30.64,31.9 v30.89,32.03 | 34.59,17.83 35.06,17.59 v35.19,17.83 | 34.59,17.83 35.06,18.07 v35.19,17.83
D6  (via drill 0.4)
  Top 0.254: 13.28,38.16 IDC_TOP.P$2 13.68,33.84 23.29,24.23 27.76,24.23 28.1,24.57 29.18,24.57 29.52,24.23 34.19,24.23 34.22,24.2 | U$3.P$18 36.85,15.37 36.82,15.4 36.82,17.22 36.66,17.39 36.66,18.21 35.73,19.13 35.39,19.13 35.21,19.31 | v34.79,19.73 35.21,19.31 | v34.69,23.83 34.59,23.83 34.22,24.2 | 34.22,24.2 34.44,23.72 v34.69,23.83 | 34.22,24.2 34.74,24.1 v34.69,23.83 | 35.21,19.31 35.05,19.81 v34.79,19.73 | 35.21,19.31 34.71,19.47 v34.79,19.73
  Bottom 0.254: v34.69,23.83 34.79,23.73 34.79,23.24 | 34.79,23.24 34.79,20.33 | 34.79,20.33 v34.79,19.73 | 34.79,23.24 34.95,23.75 v34.69,23.83 | 34.79,23.24 34.47,23.66 v34.69,23.83 | 34.79,20.33 34.55,19.86 v34.79,19.73 | 34.79,20.33 35.04,19.86 v34.79,19.73
D7
  Top 0.254: U$3.P$20 37.85,16.86 38.35,17.36 38.35,18.17 37.47,19.05 36.67,19.05 36.67,19.08 36.21,19.54 36.21,21.02 33.48,23.76 29.33,23.76 28.98,24.1 28.3,24.1 27.95,23.76 23.09,23.76 11.14,35.71 IDC_TOP.P$1
D8  (via drill 0.4)
  Top 0.254: IDC_TOP.P$19 56.86,36.2 55.89,35.23 54.29,35.23 52.88,33.82 | v52.79,33.23 52.79,33.73 52.88,33.82 | 40.31,24.51 40.62,24.2 40.62,18.16 40.26,17.8 40.26,16.66 40.85,16.07 U$3.P$26 | 40.31,24.51 v39.89,24.93 | 52.88,33.82 52.57,33.39 v52.79,33.23 | 52.88,33.82 53.05,33.32 v52.79,33.23 | 40.31,24.51 40.15,25.01 v39.89,24.93 | 40.31,24.51 39.81,24.67 v39.89,24.93
  Bottom 0.254: v52.79,33.23 52.37,33.65 | 52.37,33.65 51.59,34.43 44.59,34.43 41.99,31.83 41.99,27.63 39.89,25.53 | v39.89,24.93 39.89,25.53 | 52.37,33.65 52.53,33.15 v52.79,33.23 | 52.37,33.65 52.87,33.49 v52.79,33.23 | 39.89,25.53 39.64,25.06 v39.89,24.93 | 39.89,25.53 40.13,25.06 v39.89,24.93
D9  (via drill 0.4)
  Top 0.254: 54.62,38.26 IDC_TOP.P$18 54.32,35.96 47.49,29.13 47.49,24.33 | 47.49,24.33 v47.49,23.73 | U$3.P$28 41.85,16.82 41.92,16.89 41.92,17.57 41.09,18.4 41.09,21.51 42.35,22.76 44,22.76 46.63,20.13 46.63,19.73 | v46.59,19.13 46.59,19.63 46.63,19.67 46.63,19.73 | 47.49,24.33 47.24,23.86 v47.49,23.73 | 47.49,24.33 47.73,23.86 v47.49,23.73 | 46.63,19.73 46.35,19.27 v46.59,19.13 | 46.63,19.73 46.84,19.24 v46.59,19.13
  Bottom 0.254: v47.49,23.73 46.89,23.73 | 46.19,19.58 46.19,23.03 46.89,23.73 | 46.19,19.58 46.19,19.53 v46.59,19.13 | 46.89,23.73 47.36,23.48 v47.49,23.73 | 46.89,23.73 47.36,23.98 v47.49,23.73 | 46.19,19.58 46.32,19.06 v46.59,19.13 | 46.19,19.58 46.69,19.39 v46.59,19.13
D10  (via drill 0.4)
  Top 0.254: 44.19,38.53 IDC_TOP.P$14 44.16,36.9 40.29,33.03 40.29,31.43 44.4,27.32 | v44.99,27.23 44.49,27.23 44.4,27.32 | v41.99,19.33 41.99,18.73 | 41.99,18.73 41.99,18.23 42.49,17.73 42.49,15.53 43.35,14.67 U$3.P$31 | 44.4,27.32 44.83,27.01 v44.99,27.23 | 44.4,27.32 44.9,27.49 v44.99,27.23 | 41.99,18.73 42.23,19.2 v41.99,19.33 | 41.99,18.73 41.74,19.2 v41.99,19.33
  Bottom 0.254: v44.99,27.23 44.99,27.03 44.68,26.72 | 42.41,19.75 42.62,19.96 42.62,19.98 44.22,21.59 44.22,26.26 44.68,26.72 | 42.41,19.75 v41.99,19.33 | 44.68,26.72 45.13,26.99 v44.99,27.23 | 44.68,26.72 44.71,27.25 v44.99,27.23 | 42.41,19.75 41.91,19.59 v41.99,19.33 | 42.41,19.75 42.25,19.25 v41.99,19.33
D11  (via drill 0.4)
  Top 0.254: 41.82,38.36 IDC_TOP.P$13 41.62,35.26 39.69,33.33 39.69,31.33 45.94,25.08 46.17,25.31 | 46.17,25.31 v46.59,25.73 | v44.39,19.33 43.97,18.91 | 43.97,18.91 43.95,18.89 43.95,16.06 44.35,15.66 U$3.P$33 | 46.17,25.31 46.67,25.47 v46.59,25.73 | 46.17,25.31 46.33,25.81 v46.59,25.73 | 43.97,18.91 44.47,19.07 v44.39,19.33 | 43.97,18.91 44.13,19.41 v44.39,19.33
  Bottom 0.254: v46.59,25.73 45.99,25.73 | 45.99,25.73 45.39,25.73 45.19,25.53 45.19,21.13 44.39,20.33 44.39,19.93 | 44.39,19.93 v44.39,19.33 | 45.99,25.73 46.46,25.48 v46.59,25.73 | 45.99,25.73 46.46,25.98 v46.59,25.73 | 44.39,19.93 44.14,19.46 v44.39,19.33 | 44.39,19.93 44.63,19.46 v44.39,19.33
D12  (via drill 0.4)
  Top 0.254: 31.39,38.49 IDC_TOP.P$9 31.46,34.16 32.22,33.4 36.92,33.4 45.79,24.53 45.99,24.53 | v45.26,17.8 45.26,17.2 | 45.26,17.2 45.26,16.1 45.85,15.51 U$3.P$36 | v46.59,24.53 45.99,24.53 | 45.99,24.53 46.46,24.29 v46.59,24.53 | 45.99,24.53 46.46,24.78 v46.59,24.53 | 45.26,17.2 45.5,17.67 v45.26,17.8 | 45.26,17.2 45.01,17.67 v45.26,17.8
  Bottom 0.254: 45.26,18.4 45.26,20.5 45.69,20.93 45.69,23.63 46.17,24.11 | 45.26,18.4 v45.26,17.8 | v46.59,24.53 46.17,24.11 | 46.17,24.11 46.67,24.27 v46.59,24.53 | 46.17,24.11 46.33,24.61 v46.59,24.53 | 45.26,18.4 45.01,17.93 v45.26,17.8 | 45.26,18.4 45.5,17.93 v45.26,17.8
D13  (via drill 0.4)
  Top 0.254: IDC_TOP.P$8 28.92,35.9 31.96,32.86 36.76,32.86 47.59,22.03 47.6,22.03 | v48.19,21.93 48.09,22.03 47.6,22.03 | v46.99,18.03 46.85,17.89 46.85,17.49 | 46.85,17.49 46.85,17.45 | 46.85,17.45 U$3.P$38 | 47.6,22.03 48.02,21.71 v48.19,21.93 | 47.6,22.03 48.1,22.19 v48.19,21.93 | 46.85,17.45 47.2,17.85 v46.99,18.03 | 46.85,17.49 46.73,17.97 v46.99,18.03
  Bottom 0.254: v48.19,21.93 48.19,21.33 | 48.19,21.33 48.19,19.43 47.3,18.54 | v46.99,18.03 46.89,18.13 47.3,18.54 | 48.19,21.33 48.44,21.8 v48.19,21.93 | 48.19,21.33 47.95,21.8 v48.19,21.93 | 47.3,18.54 46.85,18.27 v46.99,18.03 | 47.3,18.54 47.27,18.01 v46.99,18.03
D14  (via drill 0.4)
  Top 0.254: U$3.P$41 48.35,19.87 38.99,29.23 37.92,29.23 | IDC_TOP.P$4 18.76,31.59 19.78,30.57 35.91,30.57 | 37.92,29.23 v37.32,29.23 | v36.39,30.93 36.39,30.91 36.05,30.57 35.91,30.57 | 35.91,30.57 36.44,30.66 v36.39,30.93 | 35.91,30.57 36.14,31.05 v36.39,30.93 | 37.92,29.23 37.45,29.48 v37.32,29.23 | 37.92,29.23 37.45,28.98 v37.32,29.23
  Bottom 0.254: v37.32,29.23 36.89,29.65 | 36.89,29.65 36.39,30.16 36.39,30.33 | 36.39,30.33 v36.39,30.93 | 36.39,30.33 36.63,30.8 v36.39,30.93 | 36.39,30.33 36.15,30.8 v36.39,30.93 | 36.89,29.65 37.06,29.15 v37.32,29.23 | 36.89,29.65 37.4,29.49 v37.32,29.23
D15
  Top 0.254: U$3.P$43 49.38,13.19 49.38,16.34 50.02,16.99 50.02,17.67 49.38,18.32 49.38,19.52 38.83,30.07 18.21,30.07 16.22,32.06 IDC_TOP.P$3
GND  (via drill 0.4)
  other vias: 42.69,10.63 28.19,19.93 31.39,10.63 54.09,15.23 42.79,34.23 47.89,35.33 50.49,29.83 48.59,27.13 58.29,33.53
  pour Top (isolate 0.2): 5.3,42.37 78.44,42.37 78.44,4.58 5.3,4.58
  pour Bottom (isolate 0.254): 5.28,42.37 78.04,42.37 78.04,5.08 5.28,5.08
N$1  (via drill 4)
  other vias: 9.09,32.73
N$2  (via drill 4)
  other vias: 9.29,11.33
N$3  (via drill 4)
  other vias: 74.29,11.23
N$4  (via drill 4)
  other vias: 74.29,32.63
VREF_0-7  (via drill 0.4)
  Top 0.254: 66.14,33.98 61.66,29.5 61.66,28.59 62.02,28.23 62.02,10.84 57.71,6.53 40.07,6.53 38.51,8.09 38.51,11.07 38.85,11.41 U$3.P$22 | 66.14,33.98 66.39,34.23 v66.69,34.23 | 66.14,33.98 66.67,33.95 v66.69,34.23 | 66.14,33.98 66.47,34.4 v66.69,34.23
  Bottom 0.254: v66.69,34.23 66.99,34.53 66.99,34.75 | IDC_BOTTOM.P$23 66.99,38.53 66.99,34.75 | 66.99,34.75 66.54,34.46 v66.69,34.23 | 66.99,34.75 66.97,34.22 v66.69,34.23
VREF_8-15  (via drill 0.4)
  Top 0.254: IDC_TOP.P$23 67.02,36.66 60.69,30.33 57.69,30.33 52.99,25.63 52.99,21.75 | 52.99,21.75 52.99,21.53 v53.29,21.23 | v49.29,20.83 49.71,20.41 | 49.71,20.41 50.35,19.77 50.35,18.01 50.49,17.87 50.49,16.79 50.35,16.65 U$3.P$45 | 52.99,21.75 53.01,21.22 v53.29,21.23 | 52.99,21.75 53.44,21.46 v53.29,21.23 | 49.71,20.41 49.55,20.91 v49.29,20.83 | 49.71,20.41 49.21,20.57 v49.29,20.83
  Bottom 0.254: v53.29,21.23 52.89,20.83 52.84,20.83 | v49.29,20.83 49.89,20.83 | 49.89,20.83 52.84,20.83 | 52.84,20.83 53.36,20.96 v53.29,21.23 | 52.84,20.83 53.03,21.33 v53.29,21.23 | 49.89,20.83 49.42,21.07 v49.29,20.83 | 49.89,20.83 49.42,20.59 v49.29,20.83